# Altium PCB PCB1.PcbDoc
Units mil, origin at the board's own origin, x right, y up, seen from the top; angles counter-clockwise.
Board outline 3779.53 x 3700.79 mil, 2 copper layers (Top Layer, Bottom Layer), stack 61.7 mil thick; 7 components, 1 nets, 26 pads, 6 vias.
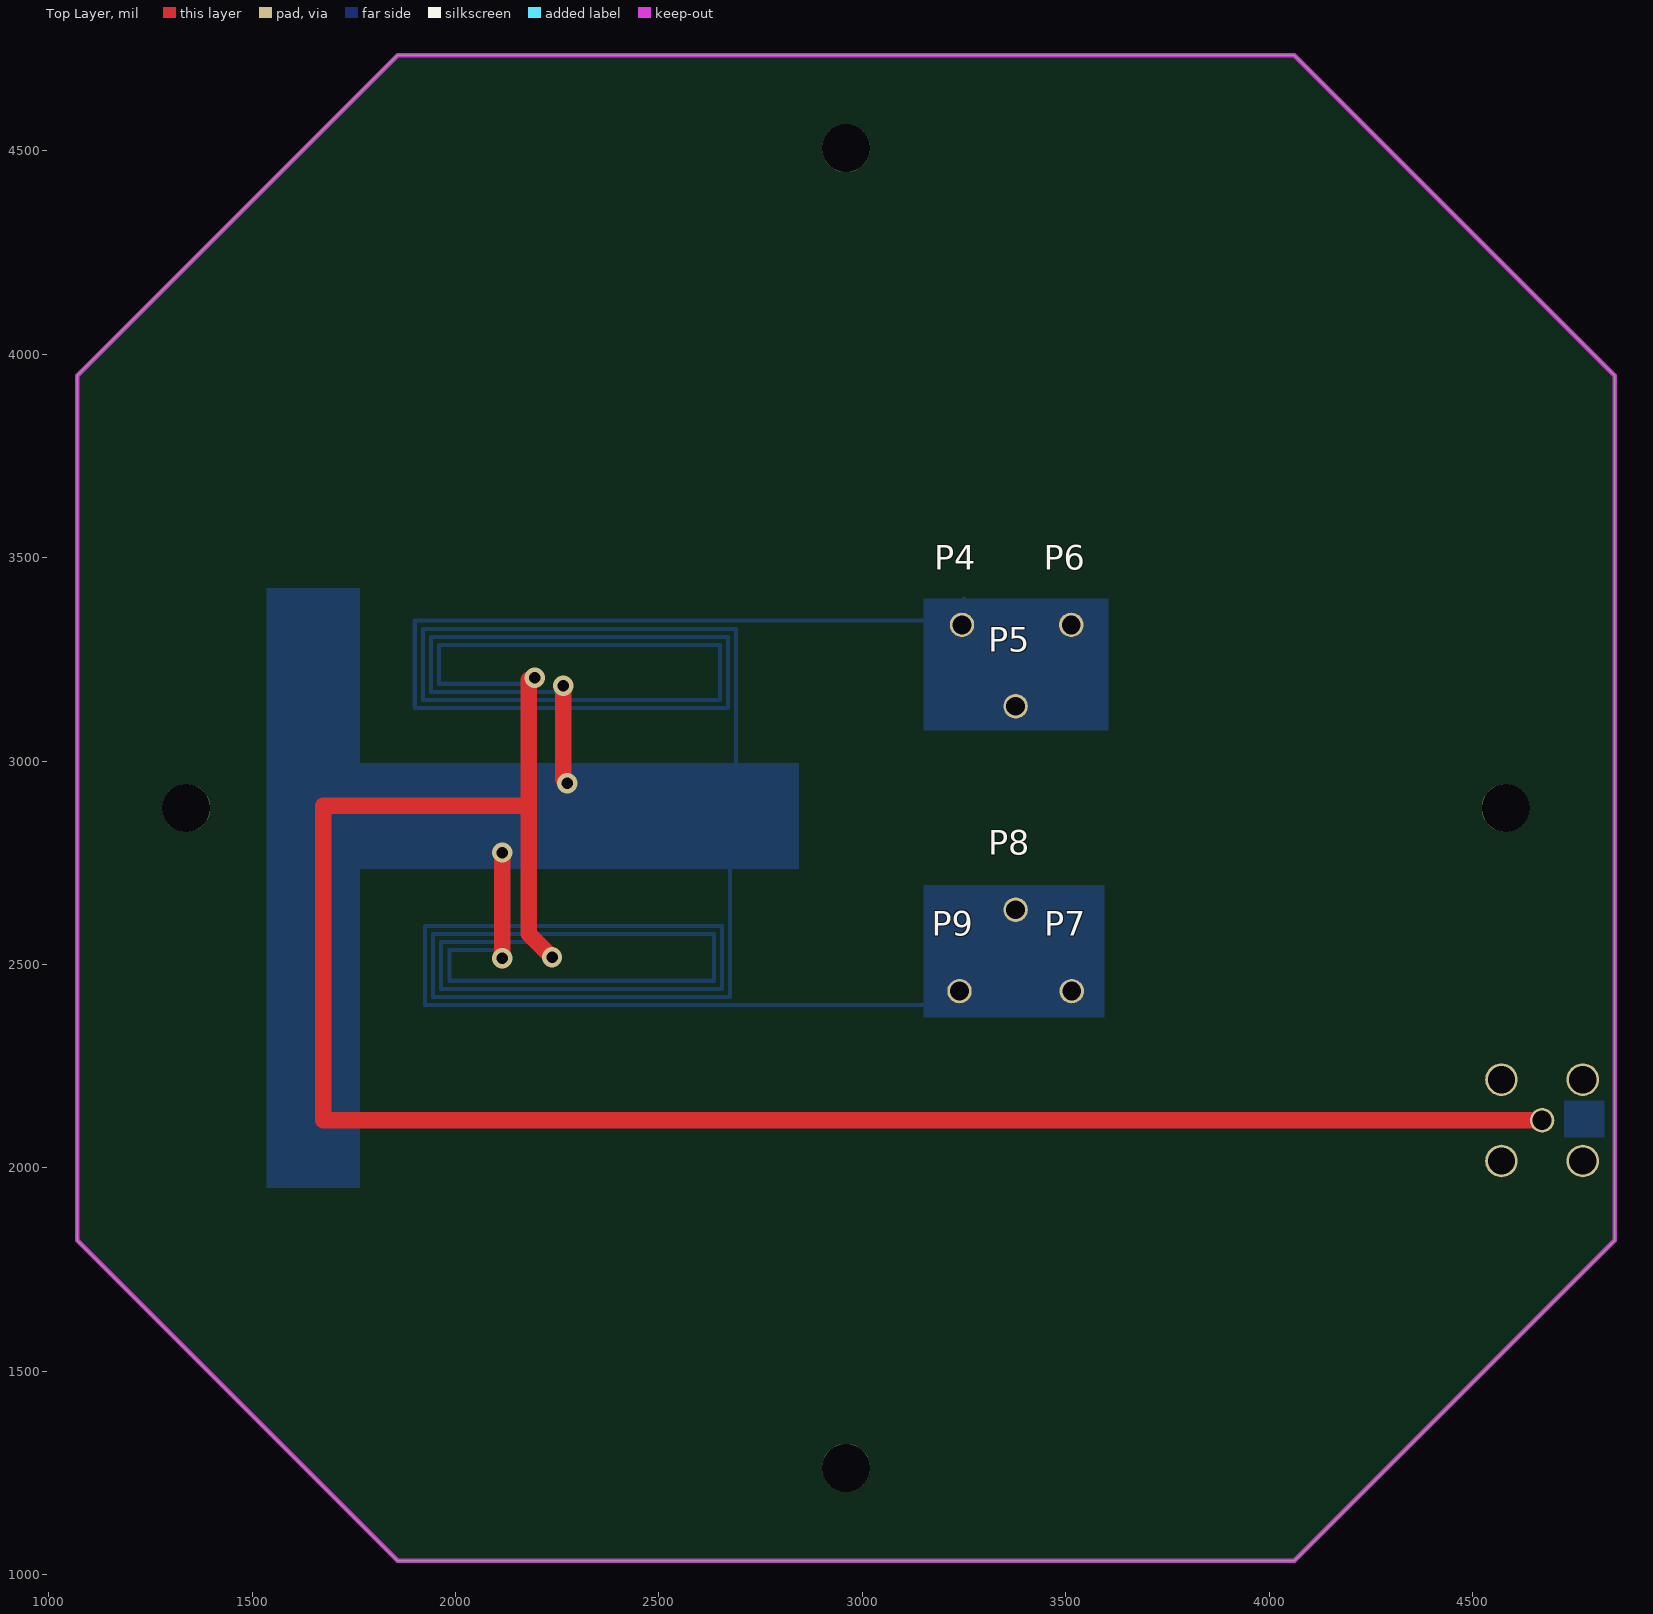
[diagram p0: Top Layer view]
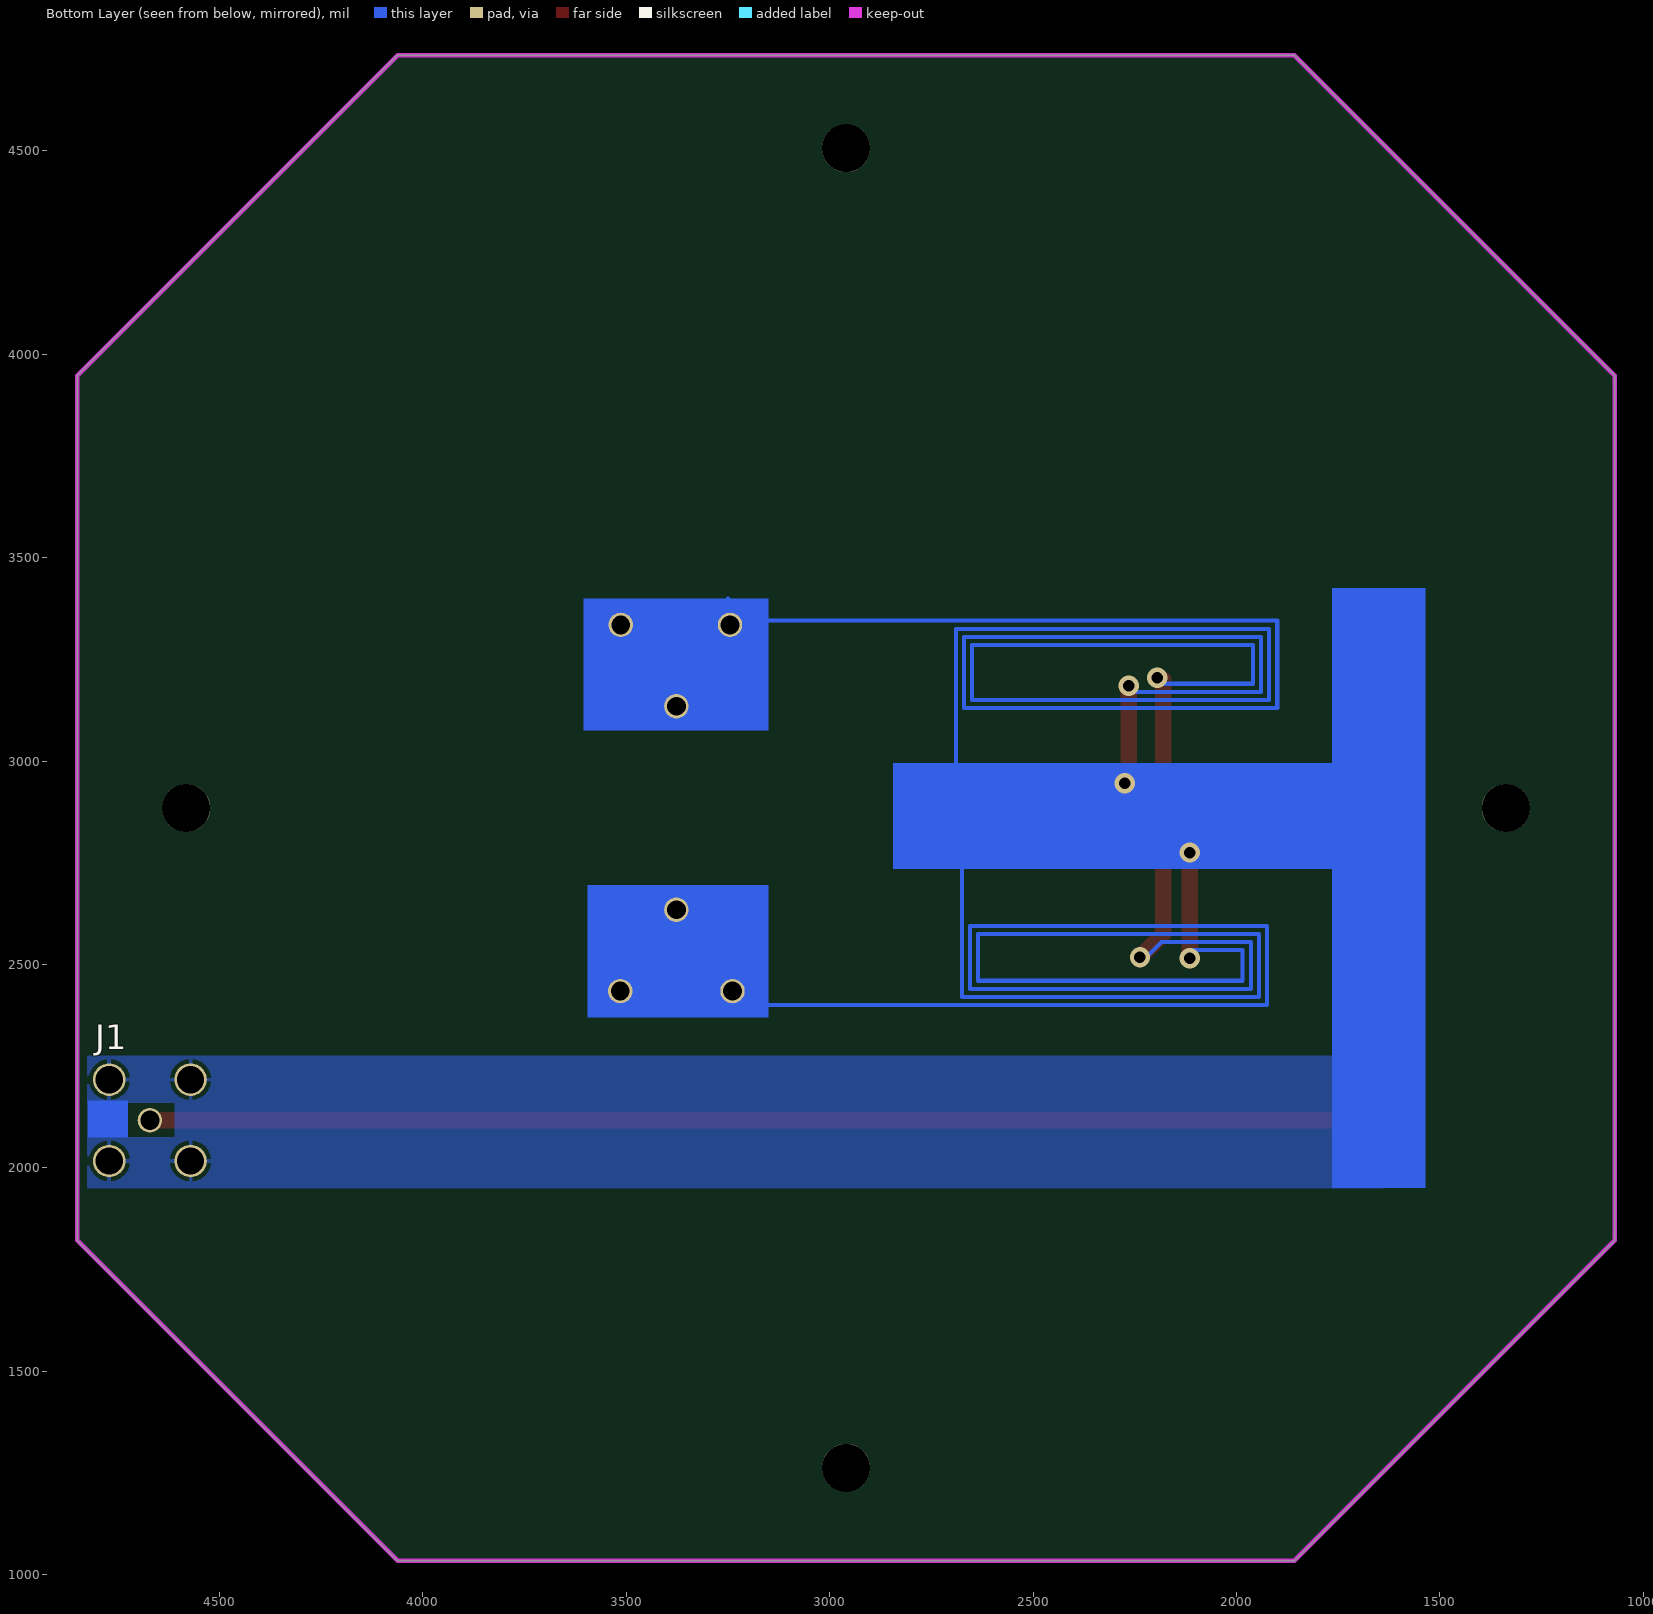
[diagram p1: Bottom Layer view, seen from below]

## Layer stack, top to bottom
Top Solder: solder mask 0.4, Solder Resist, Dk 3.5
Top Layer: signal copper 1.4
Dielectric 1: dielectric 58.9, FR-4, Dk 4.8
Bottom Layer: signal copper 1.4
Bottom Solder: solder mask 0.4, Solder Resist, Dk 3.5

## Board outline
4849.76,3947.59 4062.36,4735 1857.63,4735 1070.23,3947.59 1070.23,1821.61 1857.63,1034.21 4062.36,1034.21 4849.76,1821.61

## Design rules (kind name [scope] priority, off if disabled: settings)
Clearance [All] p1: gap=10
PolygonConnect [All] p1: connectstyle=Relief reliefconductorwidth=10 reliefentries=4 polygonreliefangle="90 Angle" airgapwidth=10
RoutingVias [All] p1: holewidth=28 width=50 viastyle="Through Hole" minholewidth=28 minwidth=50 maxholewidth=28 maxwidth=50
SolderMaskExpansion [All] p1: expansion=4
Width [All] p1: maxlimit=10 minlimit=10 preferedwidth=10
29 further rules are at their usual default settings.

## Classes and differential pairs
component class antenna-bottomside: J1 P1 P2 P3

## Components (designator, comment, footprint, x,y, rotation, side; value= is the part's Value field where it differs from the comment)
J1 "COAX-F" MCX-Jack 4671.02,2116.89 r270 bottom
P4 "Plug" Keystone_PN8737 3245.03,3334.6 r0 top (schematic designator P1)
P5 "Plug" Keystone_PN8737 3376.87,3134.6 r0 top (schematic designator P2)
P6 "Plug" Keystone_PN8737 3513.71,3334.6 r0 top (schematic designator P3)
P7 "Plug" Keystone_PN8737 3514.66,2434.6 r0 top (schematic designator P4)
P8 "Plug" Keystone_PN8737 3376.87,2634.6 r0 top (schematic designator P5)
P9 "Plug" Keystone_PN8737 3239.07,2434.6 r0 top (schematic designator P6)

## Footprints (in the part's own frame and the unit in brackets; to place one, negate y for a bottom-side part, rotate by r counter-clockwise, add the part's x,y. Pads: shape width x height; smd on the part's side, far side on the other; paste and mask are expansions set on the pad)
Keystone_PN8737 [mil] "Screw terminal, M2.5 Thru hole"
  round 60 hole 46.06: 1(0,0)
  body extent -78,-137 80,105, height 312
MCX-Jack [mil] "Connector MCX Jack R/ 50 Ohm PCB"
  round 60 hole 47: 1(0,0)
  round 80 hole 67: 2(100,100) 3(100,-100) 4(-100,-100) 5(-100,100)
  body extent -118,-118 118,256, height 237

## Part data
J1: library part MCX-Jack
P4 P5 P6 P7 P8 P9: library part AntennaPlug

## Free pads (board coordinates)
  round 118.11 hole 118.11: 1(1337.95,2884.6) 1(2960,1262.55) 1(2960,4506.65) 1(4582.04,2884.6)
  round 43.31 hole 43.31: 1(3239.07,2434.6) 1(3245.03,3334.6) 1(3376.87,2634.6) 1(3376.87,3134.6) 1(3513.71,3334.6) 1(3514.66,2434.6)
  round 47.24 hole 47.24: 1(4671.02,2116.89)
  round 66.93 hole 66.93: 2(4571.02,2016.88) 3(4771.02,2016.88) 4(4771.02,2216.89) 5(4571.02,2216.89)

## Via types
v1: diameter 50, hole 28, Top Layer to Bottom Layer, 6 vias

## Nets (pads, with @x,y where several pads share a name; then routed paths per layer and width w, separated by ;. In a path a pad name is that pad's centre, name@x,y a point inside that pad or via, vN(x,y) a via of type N, cw(c..) or ccw(c..) an arc to the next point about the centre after c; other vN are vias at no path point)
NetJ1_1: J1.1 J1.2 J1.3 J1.4 J1.5 P4.1 P5.1 P6.1 P7.1 P8.1 P9.1 pad.1@3239.07,2434.6 pad.1@3245.03,3334.6 pad.1@3376.87,2634.6 pad.1@3376.87,3134.6 pad.1@3513.71,3334.6 pad.1@3514.66,2434.6 pad.1@4671.02,2116.89 pad.2 pad.3 pad.4 pad.5 | length 18828.1
  Top Layer w10: v1@2180,3200 2175,3205 v1(2195,3205) ; v1@2265,2955 v1(2275,2945)
  Top Layer w40: v1@2115,2510 v1(2115,2515) v1(2115,2775) ; v1@2180,3200 2180,2890 ; v1(2237.5,2517.5) 2180,2575 2180,2890 ; v1@2265,2955 v1(2265,3185) ; J1.1 1675,2116.89 1675,2890 2180,2890 ; pad.1@4670.98,2119.87 pad.1@4680,2120
  Bottom Layer w10: v1@2115,2535 1985,2535 1985,2460 2635,2460 2635,2575 1945,2575 1945,2420 2675,2420 2675,2755 ; v1(2195,3205) 2195,3200 2185,3190 1960,3190 1960,3285 2650,3285 2650,3150 1920,3150 1920,3325 2690,3325 2690,2950 2745,2950 ; v1(2237.5,2517.5) 2230,2510 2185,2555 1965,2555 1965,2440 2655,2440 2655,2595 1925,2595 1925,2400 3170,2400 ; v1(2265,3185) 2250,3170 1940,3170 1940,3305 2670,3305 2670,3130 1900,3130 1900,3345 3195,3345 3250,3400

## Polygon pours and split planes (outlines as drawn)
NetJ1_1 on Bottom Layer "Bottom Layer" (solid, pour order 6): 1640,2275 1640,2160 1640,1950 4825,1950 4825,2075 4715,2075 4610,2075 4610,2160 4825,2160 4825,2275

## Keep-outs
Keep-Out Layer:
  the board outline again, w11.81

## Other copper
Bottom Layer:
  rectangle net NetJ1_1: 1535,1950 1765,3425
  rectangle net NetJ1_1: 1710,2735 2845,2995
  rectangle net NetJ1_1: 3150,2370 3595,2695
  rectangle net NetJ1_1: 3150,3075 3605,3400
  rectangle net NetJ1_1: 4725,2075 4825,2165